# EAGLE board stereo_mix (EAGLE 9.6.2), part 1 of 2
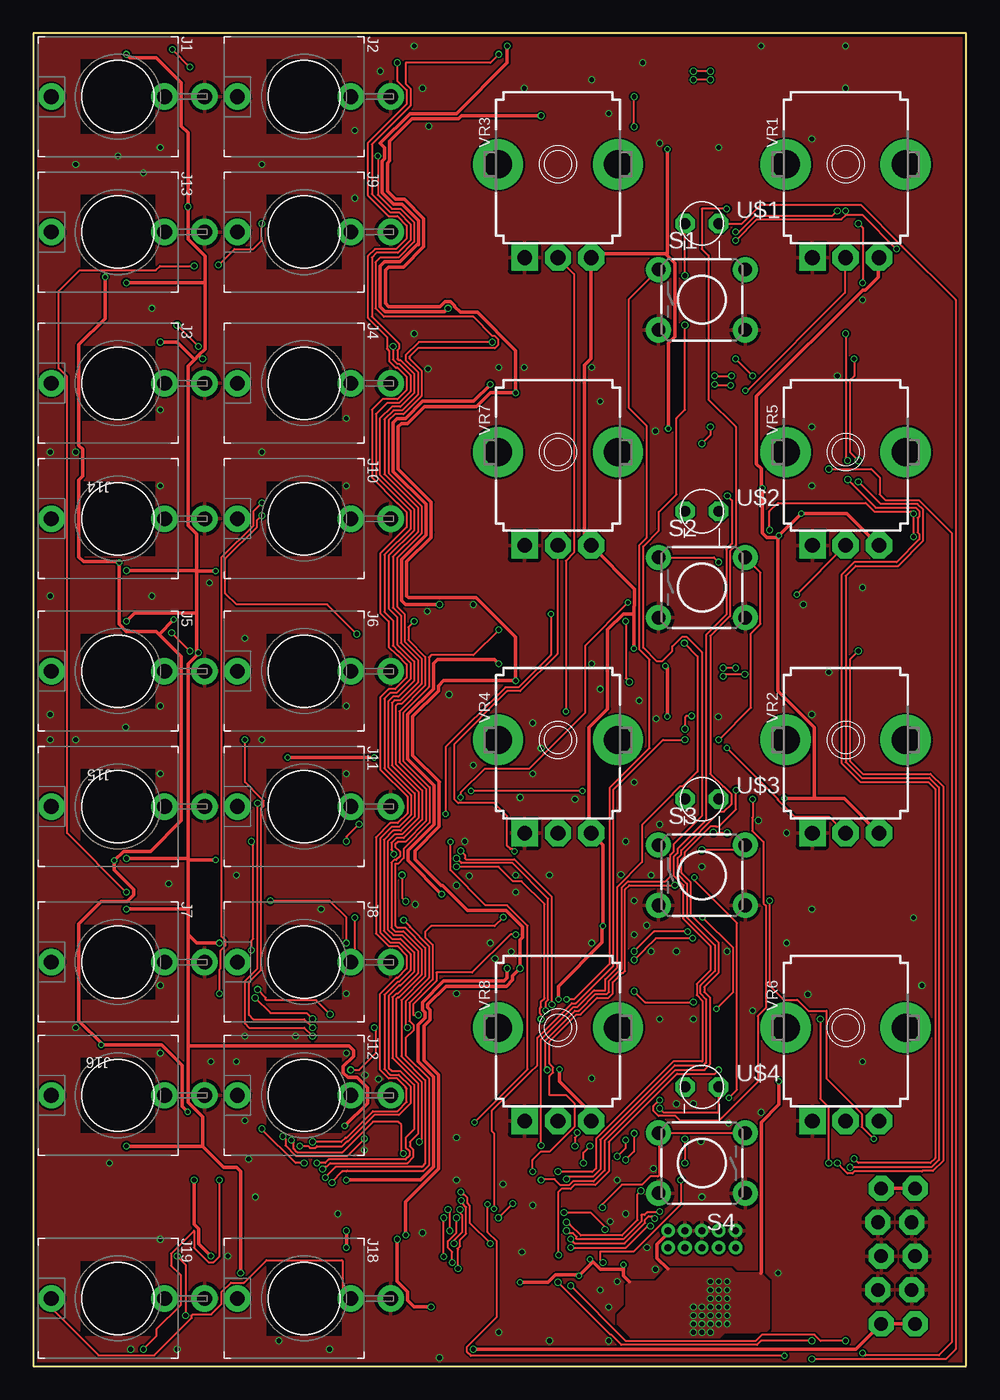
[diagram p0: board, top side]
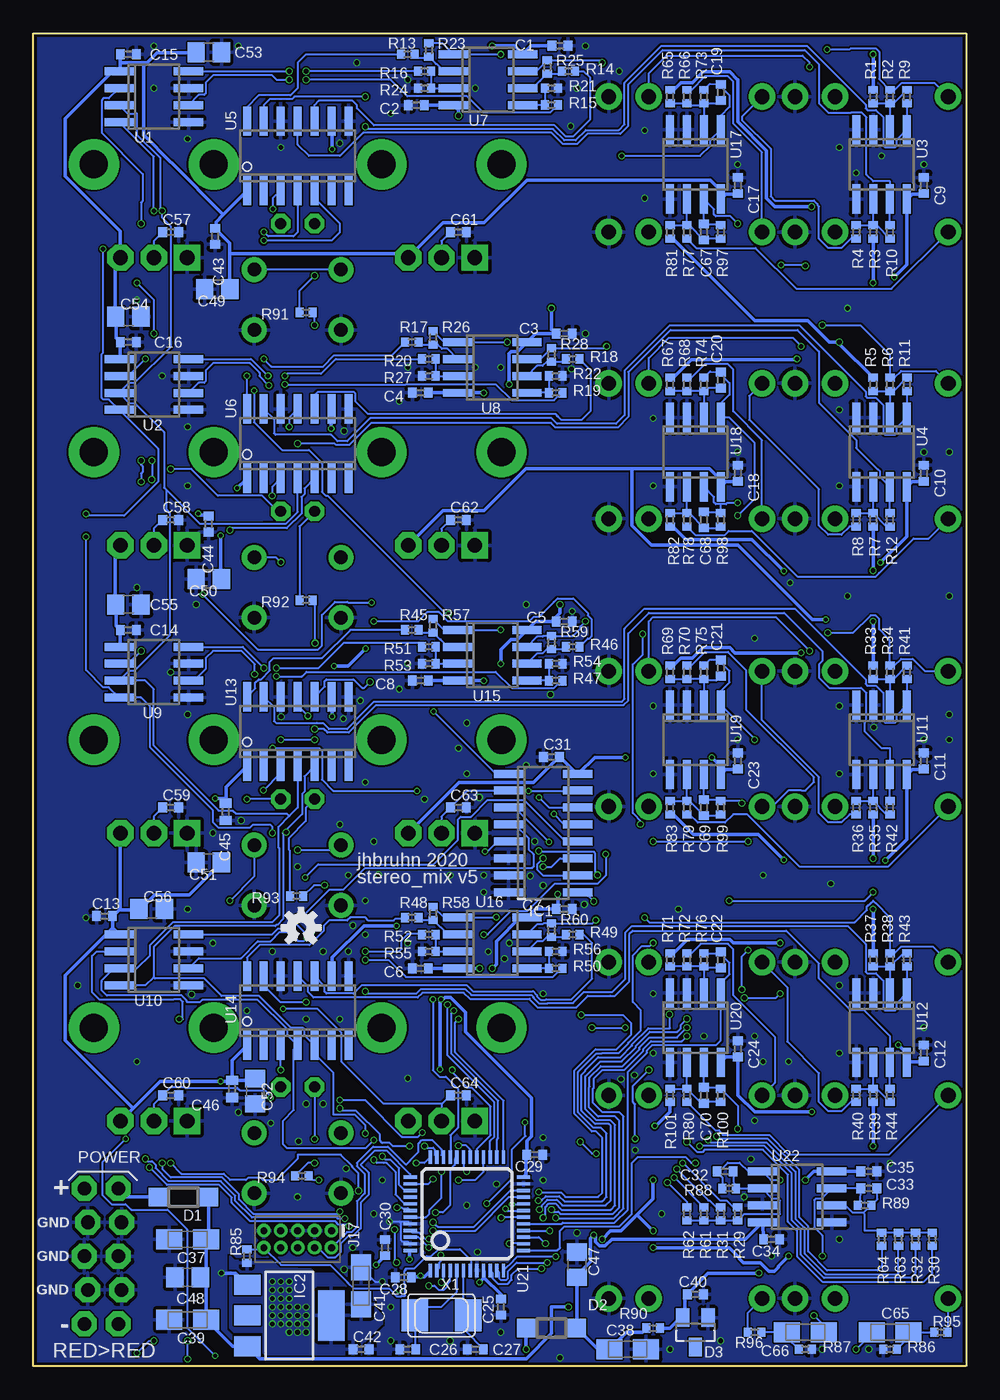
[diagram p1: board, bottom side, seen from below]

Size 70 x 100 mm. Coordinates in mm from the lower left corner, seen from the top.
Outline: 70,100 0,100 0,0 70,0 70,100
Copper layers (1*16): Top 0.035mm / dielectric 1.6mm / Bottom 0.035mm
Design rules "jlcpcb-2layers *": minimum track width 5mil, minimum drill 0.3mm, track to track 5mil, track to pad 5mil, pad to pad 5mil, via to via 5mil, smd to smd 5mil, copper to edge 0.2mm, drill to drill 6mil, minimum pad ring 10mil, minimum via ring 3mil, stop-mask expansion 4mil, vias tented up to drill 20mil, thermal gap 10mil
Net classes: 0 default: width 0.152 mm; 1 power: width 0.254 mm

## Footprints (pad centres in the part's own frame; a part is rotated, then mirrored left to right if it is on the bottom)
C0402 = smd 0.65 x 0.75: 1 -0.6,0; 2 0.6,0
EURO_PWR_HEADER_LOCK = drill 1.016 pad 1.88 octagon: GND1 -2.54,1.143; GND2 -2.54,-1.397; GND3 0,1.397; GND4 0,-1.143; GND5 2.54,1.143; GND6 2.54,-1.397; NEG1 -5.08,1.397; NEG2 -5.08,-1.143; POS1 5.08,1.397; POS2 5.08,-1.143
CASE-A_3216 = smd 1.95 x 1.5: + 1.375,0; - -1.375,0
C0402' = smd 0.7 x 0.9: 1 -0.65,0; 2 0.65,0
C0805 = smd 1.3 x 1.5: 1 -0.95,0; 2 0.95,0
SOD123 = smd 1.4 x 1.4: A 1.9,0; C -1.9,0
SOT23 = smd 1 x 1.4: 1 -0.95,-1.1; 2 0.95,-1.1; 3 0,1.1
SOIC16N = smd 0.6 x 2.2: 1 -4.445,-2.6; 2 -3.175,-2.6; 3 -1.905,-2.6; 4 -0.635,-2.6; 5 0.635,-2.6; 6 1.905,-2.6; 7 3.175,-2.6; 8 4.445,-2.6; 9 4.445,2.6; 10 3.175,2.6; 11 1.905,2.6; 12 0.635,2.6; 13 -0.635,2.6; 14 -1.905,2.6; 15 -3.175,2.6; 16 -4.445,2.6
SOT223 = smd 2 x 1.5: 1 3.15,-2.3; 2 3.15,0; 3 3.15,2.3 | smd 2 x 3.8: 4 -3.15,0
WQP-PJ301M-12_JACK = drill 1.1: P$1_TIP 0,5; P$2_SWITCH 0,-3.5; P$3_SLEEVE 0,-6.5
2X5-PTH-1.27MM = drill 0.508 pad 1: 1 -2.54,-0.635; 2 -2.54,0.635; 3 -1.27,-0.635; 4 -1.27,0.635; 5 0,-0.635; 6 0,0.635; 7 1.27,-0.635; 8 1.27,0.635; 9 2.54,-0.635; 10 2.54,0.635
R0402 = smd 0.6 x 0.7: 1 -0.5,0; 2 0.5,0
TACTILE-PTH = drill 1.016 pad 1.88: 1 -3.251,2.261; 2 3.251,2.261; 3 -3.251,-2.261; 4 3.251,-2.261
SOIC8 = smd 0.6 x 2.2: 1 -1.905,-2.6; 2 -0.635,-2.6; 3 0.635,-2.6; 4 1.905,-2.6; 5 1.905,2.6; 6 0.635,2.6; 7 -0.635,2.6; 8 -1.905,2.6
SO-14 = smd 0.6 x 2.2: 1 -3.81,-2.6; 2 -2.54,-2.6; 3 -1.27,-2.6; 4 0,-2.6; 5 1.27,-2.6; 6 2.54,-2.6; 7 3.81,-2.6; 8 3.81,2.6; 9 2.54,2.6; 10 1.27,2.6; 11 0,2.6; 12 -1.27,2.6; 13 -2.54,2.6; 14 -3.81,2.6
LQFP48 = smd 0.254 x 1: 1 -2.75,-4.25; 2 -2.25,-4.25; 3 -1.75,-4.25; 4 -1.25,-4.25; 5 -0.75,-4.25; 6 -0.25,-4.25; 7 0.25,-4.25; 8 0.75,-4.25; 9 1.25,-4.25; 10 1.75,-4.25; 11 2.25,-4.25; 12 2.75,-4.25; 25 2.75,4.25; 26 2.25,4.25; 27 1.75,4.25; 28 1.25,4.25; 29 0.75,4.25; 30 0.25,4.25; 31 -0.25,4.25; 32 -0.75,4.25; 33 -1.25,4.25; 34 -1.75,4.25; 35 -2.25,4.25; 36 -2.75,4.25 | smd 1 x 0.254: 13 4.25,-2.75; 14 4.25,-2.25; 15 4.25,-1.75; 16 4.25,-1.25; 17 4.25,-0.75; 18 4.25,-0.25; 19 4.25,0.25; 20 4.25,0.75; 21 4.25,1.25; 22 4.25,1.75; 23 4.25,2.25; 24 4.25,2.75; 37 -4.25,2.75; 38 -4.25,2.25; 39 -4.25,1.75; 40 -4.25,1.25; 41 -4.25,0.75; 42 -4.25,0.25; 43 -4.25,-0.25; 44 -4.25,-0.75; 45 -4.25,-1.25; 46 -4.25,-1.75; 47 -4.25,-2.25; 48 -4.25,-2.75
LED3MM = drill 0.813 octagon: 1 -1.27,0; 2 1.27,0
9MM_SNAP-IN_POT = drill 1.1 square: 1 -2.5,-7 | drill 1.1 octagon: 2 0,-7; 3 2.5,-7 | drill 2.1 pad 2.794: CHASSIS1 -4.5,0; CHASSIS2 4.5,0
NX5032 = smd 2 x 2.4: P$1 2,0; P$2 -2,0

## Placement (x,y rotation side)
C1  100nF  [C0402]  30.48,99.06 0 bottom
C2  100nF  [C0402]  41.27,94.61 0 bottom
C3  100nF  [C0402]  30.16,77.47 0 bottom
C4  100nF  [C0402]  40.96,73.03 0 bottom
C5  100nF  [C0402]  30.16,55.88 0 bottom
C6  100nF  [C0402]  40.96,29.84 0 bottom
C7  100nF  [C0402]  30.16,34.29 0 bottom
C8  100nF  [C0402]  40.96,51.44 0 bottom
C9  100nF  [C0402]  3.17,88.58 90 bottom
C10  100nF  [C0402]  3.17,66.99 90 bottom
C11  100nF  [C0402]  3.17,45.4 90 bottom
C12  100nF  [C0402]  3.17,23.5 90 bottom
C13  100nF  [C0402]  64.66,33.76 180 bottom
C14  100nF  [C0402]  62.87,55.24 0 bottom
C15  100nF  [C0402]  62.87,98.42 0 bottom
C16  100nF  [C0402]  62.87,76.83 0 bottom
C17  100nF  [C0402]  17.14,88.58 90 bottom
C18  100nF  [C0402]  17.14,66.99 90 bottom
C19  1.0nF  [C0402]  18.41,95.57 90 bottom
C20  1.0nF  [C0402]  18.41,73.98 90 bottom
C21  1.0nF  [C0402]  18.41,52.39 90 bottom
C22  1.0nF  [C0402]  18.41,30.48 90 bottom
C23  100nF  [C0402]  17.14,45.4 90 bottom
C24  100nF  [C0402]  17.14,23.81 90 bottom
C25  100nF  [C0402]  34.92,4.45 270 bottom
C26  22pF  [C0402]  41.91,1.27 0 bottom
C27  22pF  [C0402]  36.83,1.27 0 bottom
C28  100nF  [C0402]  42.23,6.67 180 bottom
C29  100nF  [C0402]  32.38,15.88 0 bottom
C30  100nF  [C0402]  43.6,8.89 90 bottom
C31  100nF  [C0402]  31.11,45.72 180 bottom
C32  220pF  [C0402]  18.1,14.61 180 bottom
C33  220pF  [C0402]  7.3,13.34 180 bottom
C34  100nF  [C0402]  14.61,9.53 180 bottom
C35  100nF  [C0402]  7.3,14.61 0 bottom
C36  EURO_POWER_LOCKFAT-LOCK  [EURO_PWR_HEADER_LOCK]  64.77,8.26 90 bottom
C37  10uF  [CASE-A_3216]  58.42,9.53 0 bottom
C38  10uF  [CASE-A_3216]  25.4,1.27 0 bottom
C39  10uF  [CASE-A_3216]  58.42,3.49 0 bottom
C40  100nF  [C0402]  20.32,5.4 0 bottom
C41  10uF  [CASE-A_3216]  45.4,6.03 270 bottom
C42  100nF  [C0402]  45.4,1.27 0 bottom
C43  100nF  [C0402]  56.36,84.77 270 bottom
C44  100nF  [C0402]  56.83,63.18 270 bottom
C45  100nF  [C0402']  55.56,41.59 270 bottom
C46  100nF  [C0402']  55.09,20.8 270 bottom
C47  22uF  [C0805]  29.21,7.62 270 bottom
C48  22uF  [C0805]  58.42,6.67 180 bottom
C49  10uF  [C0805]  56.2,80.8 180 bottom
C50  10uF  [C0805]  56.83,59.05 180 bottom
C51  10uF  [C0805]  56.83,37.78 180 bottom
C52  10uF  [C0805]  53.34,20.64 270 bottom
C53  10uF  [C0805]  56.83,98.58 0 bottom
C54  10uF  [C0805]  62.87,78.74 0 bottom
C55  10uF  [C0805]  62.87,57.15 0 bottom
C56  10uF  [C0805]  61.12,34.29 0 bottom
C57  100nF  [C0402]  59.69,85.09 0 bottom
C58  100nF  [C0402]  59.69,63.5 0 bottom
C59  100nF  [C0402]  59.69,41.91 0 bottom
C60  100nF  [C0402]  59.69,20.32 0 bottom
C61  100nF  [C0402]  38.1,85.09 0 bottom
C62  100nF  [C0402]  38.1,63.5 0 bottom
C63  100nF  [C0402]  38.1,41.91 0 bottom
C64  100nF  [C0402]  38.1,20.32 0 bottom
C65  10uF  [CASE-A_3216]  5.71,2.54 180 bottom
C66  10uF  [CASE-A_3216]  12.06,2.54 0 bottom
C67  1.0nF  [C0402]  19.68,85.09 90 bottom
C68  1.0nF  [C0402]  19.68,63.5 90 bottom
C69  1.0nF  [C0402]  19.68,41.91 90 bottom
C70  1.0nF  [C0402]  19.68,20.32 90 bottom
D1  B5819W  [SOD123]  58.74,12.7 180 bottom
D2  B5819W  [SOD123]  31.11,2.86 0 bottom
D3  LM4040AIM3-10.0  [SOT23]  20.32,2.54 180 bottom
IC1  4051CD4051  [SOIC16N]  31.75,40.01 270 bottom
IC2  AMS1117-3.3  [SOT223]  50.8,3.81 180 bottom
J1  WQP-PJ301M-12_JACK  [WQP-PJ301M-12_JACK]  6.35,95.25 90 top
J2  WQP-PJ301M-12_JACK  [WQP-PJ301M-12_JACK]  20.32,95.25 90 top
J3  WQP-PJ301M-12_JACK  [WQP-PJ301M-12_JACK]  6.35,73.74 90 top
J4  WQP-PJ301M-12_JACK  [WQP-PJ301M-12_JACK]  20.32,73.74 90 top
J5  WQP-PJ301M-12_JACK  [WQP-PJ301M-12_JACK]  6.35,52.15 90 top
J6  WQP-PJ301M-12_JACK  [WQP-PJ301M-12_JACK]  20.32,52.15 90 top
J7  WQP-PJ301M-12_JACK  [WQP-PJ301M-12_JACK]  6.35,30.32 90 top
J8  WQP-PJ301M-12_JACK  [WQP-PJ301M-12_JACK]  20.32,30.32 90 top
J9  WQP-PJ301M-12_JACK  [WQP-PJ301M-12_JACK]  20.32,85.09 90 top
J10  WQP-PJ301M-12_JACK  [WQP-PJ301M-12_JACK]  20.32,63.58 90 top
J11  WQP-PJ301M-12_JACK  [WQP-PJ301M-12_JACK]  20.32,41.99 90 top
J12  WQP-PJ301M-12_JACK  [WQP-PJ301M-12_JACK]  20.32,20.32 90 top
J13  WQP-PJ301M-12_JACK  [WQP-PJ301M-12_JACK]  6.35,85.09 90 top
J14  WQP-PJ301M-12_JACK  [WQP-PJ301M-12_JACK]  6.35,63.58 90 top
J15  WQP-PJ301M-12_JACK  [WQP-PJ301M-12_JACK]  6.35,41.99 90 top
J16  WQP-PJ301M-12_JACK  [WQP-PJ301M-12_JACK]  6.35,20.32 90 top
J17  CORTEX_DEBUG_PTH  [2X5-PTH-1.27MM]  50.16,9.53 180 bottom
J18  WQP-PJ301M-12_JACK  [WQP-PJ301M-12_JACK]  20.32,5.08 90 top
J19  WQP-PJ301M-12_JACK  [WQP-PJ301M-12_JACK]  6.35,5.08 90 top
LOGO1  OSHW-LOGOS  [OSHW-LOGO-S]  49.91,32.89 0 bottom
R1  91k  [R0402]  6.99,95.25 270 bottom
R2  100k  [R0402]  5.71,95.25 270 bottom
R3  91k  [R0402]  6.99,85.09 90 bottom
R4  100k  [R0402]  8.26,85.09 90 bottom
R5  91k  [R0402]  6.99,73.66 270 bottom
R6  100k  [R0402]  5.71,73.66 270 bottom
R7  91k  [R0402]  6.99,63.5 90 bottom
R8  100k  [R0402]  8.26,63.5 90 bottom
R9  15k  [R0402]  4.45,95.25 270 bottom
R10  15k  [R0402]  5.71,85.09 90 bottom
R11  15k  [R0402]  4.45,73.66 270 bottom
R12  15k  [R0402]  5.71,63.5 90 bottom
R13  47k  [R0402]  41.91,98.42 0 bottom
R14  47k  [R0402]  29.84,97.16 180 bottom
R15  47k  [R0402]  31.11,94.61 180 bottom
R16  47k  [R0402]  40.64,97.16 0 bottom
R17  47k  [R0402]  41.59,76.83 0 bottom
R18  47k  [R0402]  29.53,75.56 180 bottom
R19  47k  [R0402]  30.8,73.03 180 bottom
R20  47k  [R0402]  40.32,75.56 0 bottom
R21  100k  [R0402]  31.11,95.89 180 bottom
R22  100k  [R0402]  30.8,74.3 0 bottom
R23  300k  [R0402]  40.32,98.74 90 bottom
R24  100k  [R0402]  40.64,95.89 180 bottom
R25  300k  [R0402]  31.43,97.47 90 bottom
R26  300k  [R0402]  40.01,77.15 90 bottom
R27  100k  [R0402]  40.32,74.3 180 bottom
R28  300k  [R0402]  31.11,75.88 90 bottom
R29  100k  [R0402]  17.14,11.43 270 bottom
R30  100k  [R0402]  2.54,9.53 90 bottom
R31  100k  [R0402]  18.41,11.43 270 bottom
R32  100k  [R0402]  3.81,9.53 90 bottom
R33  91k  [R0402]  6.99,52.07 270 bottom
R34  100k  [R0402]  5.71,52.07 270 bottom
R35  91k  [R0402]  6.99,41.91 90 bottom
R36  100k  [R0402]  8.26,41.91 90 bottom
R37  91k  [R0402]  6.99,30.48 270 bottom
R38  100k  [R0402]  5.71,30.48 270 bottom
R39  91k  [R0402]  6.99,20.32 90 bottom
R40  100k  [R0402]  8.26,20.32 90 bottom
R41  15k  [R0402]  4.45,52.07 270 bottom
R42  15k  [R0402]  5.71,41.91 90 bottom
R43  15k  [R0402]  4.45,30.48 270 bottom
R44  15k  [R0402]  5.71,20.32 90 bottom
R45  47k  [R0402]  41.59,55.24 0 bottom
R46  47k  [R0402]  29.53,53.98 180 bottom
R47  47k  [R0402]  30.8,51.44 180 bottom
R48  47k  [R0402]  41.59,33.66 0 bottom
R49  47k  [R0402]  29.53,32.38 180 bottom
R50  47k  [R0402]  30.8,29.84 180 bottom
R51  47k  [R0402]  40.32,53.98 0 bottom
R52  47k  [R0402]  40.32,32.38 0 bottom
R53  100k  [R0402]  40.32,52.7 0 bottom
R54  100k  [R0402]  30.8,52.7 180 bottom
R55  100k  [R0402]  40.32,31.11 0 bottom
R56  100k  [R0402]  30.8,31.11 180 bottom
R57  300k  [R0402]  40.01,55.56 90 bottom
R58  300k  [R0402]  40.01,33.97 90 bottom
R59  300k  [R0402]  31.11,54.29 90 bottom
R60  300k  [R0402]  31.11,32.7 90 bottom
R61  100k  [R0402]  19.68,11.43 270 bottom
R62  100k  [R0402]  20.95,11.43 270 bottom
R63  100k  [R0402]  5.08,9.53 90 bottom
R64  100k  [R0402]  6.35,9.53 90 bottom
R65  120k  [R0402]  22.23,95.25 270 bottom
R66  100k  [R0402]  20.95,95.25 270 bottom
R67  120k  [R0402]  22.23,73.66 270 bottom
R68  100k  [R0402]  20.95,73.66 270 bottom
R69  120k  [R0402]  22.23,52.07 270 bottom
R70  100k  [R0402]  20.95,52.07 270 bottom
R71  120k  [R0402]  22.23,30.48 270 bottom
R72  100k  [R0402]  20.95,30.48 270 bottom
R73  20k  [R0402]  19.68,95.25 90 bottom
R74  20k  [R0402]  19.68,73.66 90 bottom
R75  20k  [R0402]  19.68,52.07 90 bottom
R76  20k  [R0402]  19.68,30.48 90 bottom
R77  200k  [R0402]  20.95,85.09 270 bottom
R78  200k  [R0402]  20.95,63.5 270 bottom
R79  200k  [R0402]  20.95,41.91 270 bottom
R80  200k  [R0402]  20.95,20.32 270 bottom
R81  120k  [R0402]  22.23,85.09 90 bottom
R82  120k  [R0402]  22.23,63.5 90 bottom
R83  120k  [R0402]  22.23,41.91 90 bottom
R85  10k  [R0402]  53.98,8.26 270 bottom
R86  47k  [R0402]  5.71,1.27 0 bottom
R87  47k  [R0402]  12.06,1.27 180 bottom
R88  100k  [R0402]  17.78,13.34 180 bottom
R89  100k  [R0402]  7.62,12.06 180 bottom
R90  470R  [R0402]  23.5,2.86 180 bottom
R91  100R  [R0402]  49.53,79.06 180 bottom
R92  100R  [R0402]  49.53,57.47 180 bottom
R93  100R  [R0402]  50.24,35.27 180 bottom
R94  100R  [R0402]  49.85,14.29 180 bottom
R95  1k  [R0402]  1.91,2.54 0 bottom
R96  1k  [R0402]  15.88,2.54 180 bottom
R97  20k  [R0402]  18.41,85.09 90 bottom
R98  20k  [R0402]  18.41,63.5 90 bottom
R99  20k  [R0402]  18.41,41.91 90 bottom
R100  20k  [R0402]  18.41,20.32 90 bottom
R101  120k  [R0402]  22.23,20.32 90 bottom
S1  [TACTILE-PTH]  50.16,80.01 0 top
S2  [TACTILE-PTH]  50.16,58.42 0 top
S3  [TACTILE-PTH]  50.16,36.83 0 top
S4  [TACTILE-PTH]  50.16,15.24 180 top
U1  MCP4822E-SN  [SOIC8]  60.96,95.25 270 bottom
U2  MCP4822E-SN  [SOIC8]  60.96,73.66 270 bottom
U3  MCP6002T-I/SN  [SOIC8]  6.35,90.17 180 bottom
U4  MCP6002T-I/SN  [SOIC8]  6.35,68.58 180 bottom
U5  MCP4922E/SL  [SO-14]  50.16,90.81 0 bottom
U6  MCP4922E/SL  [SO-14]  50.16,69.22 0 bottom
U7  TL072CD  [SOIC8]  35.88,96.52 270 bottom
U8  TL072CD  [SOIC8]  35.56,74.93 270 bottom
U9  MCP4822E-SN  [SOIC8]  60.96,52.07 270 bottom
U10  MCP4822E-SN  [SOIC8]  60.96,30.48 270 bottom
U11  MCP6002T-I/SN  [SOIC8]  6.35,46.99 180 bottom
U12  MCP6002T-I/SN  [SOIC8]  6.35,25.4 180 bottom
U13  MCP4922E/SL  [SO-14]  50.16,47.62 0 bottom
U14  MCP4922E/SL  [SO-14]  50.16,26.67 0 bottom
U15  TL072CD  [SOIC8]  35.56,53.34 270 bottom
U16  TL072CD  [SOIC8]  35.56,31.75 270 bottom
U17  MCP6002T-I/SN  [SOIC8]  20.32,90.17 180 bottom
U18  MCP6002T-I/SN  [SOIC8]  20.32,68.58 180 bottom
U19  MCP6002T-I/SN  [SOIC8]  20.32,46.99 180 bottom
U20  MCP6002T-I/SN  [SOIC8]  20.32,25.4 180 bottom
U21  STM32F030C8T6  [LQFP48]  37.47,11.43 0 bottom
U22  TL072CD  [SOIC8]  12.7,12.7 270 bottom
U$1  LED-BICOLOR-SHARED-THROUGHHOLE  [LED3MM]  50.16,85.72 0 top
U$2  LED-BICOLOR-SHARED-THROUGHHOLE  [LED3MM]  50.16,64.14 0 top
U$3  LED-BICOLOR-SHARED-THROUGHHOLE  [LED3MM]  50.16,42.55 0 top
U$4  LED-BICOLOR-SHARED-THROUGHHOLE  [LED3MM]  50.16,20.95 0 top
VR1  10k  [9MM_SNAP-IN_POT]  60.96,90.17 0 top
VR2  10k  [9MM_SNAP-IN_POT]  60.96,46.99 0 top
VR3  10k  [9MM_SNAP-IN_POT]  39.37,90.17 0 top
VR4  10k  [9MM_SNAP-IN_POT]  39.37,46.99 0 top
VR5  10k  [9MM_SNAP-IN_POT]  60.96,68.58 0 top
VR6  10k  [9MM_SNAP-IN_POT]  60.96,25.4 0 top
VR7  10k  [9MM_SNAP-IN_POT]  39.37,68.58 0 top
VR8  10k  [9MM_SNAP-IN_POT]  39.37,25.4 0 top
X1  8MHz  [NX5032]  39.37,3.81 0 bottom

## Library data of the parts
C1-C35 C37-C44 C47-C70 = jhbruhn-cdr; SPICEPREFIX: C
C36 = MusicThingModular
C45 C46 = jhbruhn-cr; SPICEPREFIX: C
D1 D2 X1 = jhbruhn-cdr
D3 = jhbruhn-ref
IC1 IC2 = jhbruhn-ic
J1-J19 S1-S4 U$1-U$4 VR1-VR8 = jhbruhn-physical
LOGO1 = SparkFun-Aesthetics
R1-R83 R85 R88-R90 R97-R101 = jhbruhn-cr; SPICEPREFIX: R
R86 R87 R91-R96 = jhbruhn-cdr; SPICEPREFIX: R
U1 U2 U5 U6 U9 U10 U13 U14 = jhbruhn-dac
U3 U4 U7 U8 U11 U12 U15-U20 U22 = jhbruhn-opamp
U21 = jhbruhn-mcu

## Nets
1_IN_L: J1.P$1_TIP J2.P$2_SWITCH R2.1
1_IN_R: J2.P$1_TIP R4.1
2_IN_L: J3.P$1_TIP J4.P$2_SWITCH R6.1
2_IN_R: J4.P$1_TIP R8.1
2_PAN_CV_IN: J10.P$1_TIP R68.1
2_VOLUME_CV: J14.P$1_TIP R78.2
3_IN_L: J5.P$1_TIP J6.P$2_SWITCH R34.1
3_IN_R: J6.P$1_TIP R36.1
3_PAN_CV_IN: J11.P$1_TIP R70.1
3_VOLUME_CV: J15.P$1_TIP R79.2
4_IN_L: J7.P$1_TIP J8.P$2_SWITCH R38.1
4_IN_R: J8.P$1_TIP R40.1
4_PAN_CV_IN: J12.P$1_TIP R72.1
4_VOLUME_CV: J16.P$1_TIP R80.2
+3V3 [power]: C9.1 C10.1 C11.1 C12.1 C13.1 C14.1 C15.1 C16.1 C17.1 C18.1 C23.1 C24.1 C25.1 C28.1 C29.1 C30.1 C31.1 C41.+ C42.1 C43.1 C44.1 C45.1 C46.1 C49.1 C50.1 C51.1 C52.1 C53.1 C54.1 C55.1 C56.1 IC1.16 IC2.4 J17.1 R85.2 U1.1 U2.1 U3.8 U4.8 U5.1 U5.9 U6.1 U6.9 U9.1 U10.1 U11.8 U12.8 U13.1 U13.9 U14.1 U14.9 U17.8 U18.8 U19.8 U20.8 U21.1 U21.9 U21.24 U21.48 VR1.3 VR2.3 VR3.3 VR4.3 VR5.3 VR6.3 VR7.3 VR8.3
+12V [power]: C1.1 C3.1 C5.1 C7.1 C35.1 C37.+ C39.+ C48.1 D1.C IC2.3 U7.8 U8.8 U15.8 U16.8 U22.8
-12V [power]: C2.2 C4.2 C6.2 C8.2 C34.2 C38.- C47.2 D2.A R90.2 U7.4 U8.4 U15.4 U16.4 U22.4
AREF_-10 [power]: C40.1 D3.2 R1.1 R3.1 R5.1 R7.1 R33.1 R35.1 R37.1 R39.1 R65.1 R67.1 R69.1 R71.1 R81.1 R82.1 R83.1 R90.1 R101.1
BIAS_DAC1_L: R16.1 U1.8
BIAS_DAC1_R: R15.1 U1.6
BIAS_DAC2_L: R20.1 U2.8
BIAS_DAC2_R: R19.1 U2.6
BIAS_DAC3_L: R51.1 U9.8
BIAS_DAC3_R: R47.1 U9.6
BIAS_DAC4_L: R52.1 U10.8
BIAS_DAC4_R: R50.1 U10.6
CS_BIAS_DAC_1: U1.2 U21.45
CS_BIAS_DAC_2: U2.2 U21.46
CS_BIAS_DAC_3: U9.2 U21.21
CS_BIAS_DAC_4: U10.2 U21.22
CS_DAC_1: U5.3 U21.38
CS_DAC_2: U6.3 U21.43
CS_DAC_3: U13.3 U21.28
CS_DAC_4: U14.3 U21.2
GND: C1.2 C2.1 C3.2 C4.1 C5.2 C6.1 C7.2 C8.1 C9.2 C10.2 C11.2 C12.2 C13.2 C14.2 C15.2 C16.2 C17.2 C18.2 C23.2 C24.2 C25.2 C26.1 C27.1 C28.2 C29.2 C30.2 C31.2 C34.1 C35.2 C36.GND1 C36.GND2 C36.GND3 C36.GND4 C36.GND5 C36.GND6 C37.- C38.+ C39.- C40.2 C41.- C42.2 C43.2 C44.2 C45.2 C46.2 C47.1 C48.2 C49.2 C50.2 C51.2 C52.2 C53.2 C54.2 C55.2 C56.2 C57.2 C58.2 C59.2 C60.2 C61.2 C62.2 C63.2 C64.2 D3.1 IC1.6 IC1.7 IC1.8 IC2.1 J1.P$3_SLEEVE J2.P$3_SLEEVE J3.P$3_SLEEVE J4.P$3_SLEEVE J5.P$3_SLEEVE J6.P$3_SLEEVE J7.P$3_SLEEVE J8.P$3_SLEEVE J9.P$3_SLEEVE J10.P$3_SLEEVE J11.P$3_SLEEVE J12.P$3_SLEEVE J13.P$3_SLEEVE J14.P$3_SLEEVE J15.P$3_SLEEVE J16.P$3_SLEEVE J17.3 J17.5 J17.9 J18.P$3_SLEEVE J19.P$3_SLEEVE R21.1 R22.2 R24.2 R27.2 R53.1 R54.1 R55.1 R56.1 R86.1 R87.1 S1.3 S1.4 S2.3 S2.4 S3.3 S3.4 S4.1 S4.2 U1.5 U1.7 U2.5 U2.7 U3.3 U3.4 U3.5 U4.3 U4.4 U4.5 U5.8 U5.12 U6.8 U6.12 U9.5 U9.7 U10.5 U10.7 U11.3 U11.4 U11.5 U12.3 U12.4 U12.5 U13.8 U13.12 U14.8 U14.12 U17.3 U17.4 U17.5 U18.3 U18.4 U18.5 U19.3 U19.4 U19.5 U20.3 U20.4 U20.5 U21.8 U21.23 U21.44 U21.47 U22.3 U22.5 VR1.1 VR2.1 VR3.1 VR4.1 VR5.1 VR6.1 VR7.1 VR8.1
LED_1: R91.1 U21.29
LED_1_N: U21.3 U$1.2
LED_2: R92.1 U21.30
LED_2_N: U21.4 U$2.2
LED_3: R93.1 U21.31
LED_3_N: U21.35 U$3.2
LED_4: R94.1 U21.32
LED_4_N: U21.36 U$4.2
MISO: U21.40
MOSI: U1.4 U2.4 U5.5 U6.5 U9.4 U10.4 U13.5 U14.5 U21.41
MUX_ADDR_0: IC1.11 U21.25
MUX_ADDR_1: IC1.10 U21.26
MUX_ADDR_2: IC1.9 U21.27
N$1: R13.1 U5.14
N$2: R3.2 R4.2 R10.1 U3.6
N$3: R13.2 R23.1 U7.2
N$4: R9.2 U3.1 U5.13
N$5: R10.2 U3.7 U5.11
N$6: R1.2 R2.2 R9.1 U3.2
N$7: R25.2 R30.1 U7.7
N$8: R23.2 R29.1 U7.1
N$9: R14.2 R25.1 U7.6
N$10: R14.1 U5.10
N$12: R91.2 U$1.1
N$13: R92.2 U$2.1
N$14: R16.2 R24.1 U7.3
N$15: C69.1 R79.1 R83.2 R99.1 U19.6
N$16: R15.2 R21.2 U7.5
N$17: C70.1 R80.1 R100.1 R101.2 U20.6
N$18: R93.2 U$3.1
N$19: R7.2 R8.2 R12.1 U4.6
N$20: R12.2 U4.7 U6.11
N$21: R11.2 U4.1 U6.13
N$22: R5.2 R6.2 R11.1 U4.2
N$23: R17.1 U6.14
N$24: R17.2 R26.1 U8.2
N$25: R26.2 R31.1 U8.1
N$26: R18.2 R28.1 U8.6
N$27: R18.1 U6.10
N$28: R28.2 R32.1 U8.7
N$29: R35.2 R36.2 R42.1 U11.6
N$30: R42.2 U11.7 U13.11
N$31: R41.2 U11.1 U13.13
N$32: C19.1 R65.2 R66.2 R73.1 U17.2
N$33: R33.2 R34.2 R41.1 U11.2
N$34: R45.1 U13.14
N$35: R45.2 R57.1 U15.2
N$36: R57.2 R61.1 U15.1
N$37: R46.2 R59.1 U15.6
N$38: R46.1 U13.10
N$39: R59.2 R63.1 U15.7
N$40: R39.2 R40.2 R44.1 U12.6
N$41: R44.2 U12.7 U14.11
N$42: R94.2 U$4.1
N$43: J18.P$2_SWITCH J19.P$1_TIP R95.2
N$44: R43.2 U12.1 U14.13
N$45: C65.- R86.2 R95.1
N$46: R37.2 R38.2 R43.1 U12.2
N$47 [power]: C36.POS1 C36.POS2 D1.A
N$48 [power]: C36.NEG1 C36.NEG2 D2.C
N$49: R48.1 U14.14
N$50: R48.2 R58.1 U16.2
N$51: R58.2 R62.1 U16.1
N$52: R49.2 R60.1 U16.6
N$53: R49.1 U14.10
N$54: R60.2 R64.1 U16.7
N$56: J18.P$1_TIP R96.2
N$57: C66.- R87.2 R96.1
N$62: C22.1 R71.2 R72.2 R76.1 U20.2
N$63: C21.1 R69.2 R70.2 R75.1 U19.2
N$64: C20.1 R67.2 R68.2 R74.1 U18.2
N$65: C67.1 R77.1 R81.2 R97.1 U17.6
N$67: R20.2 R27.1 U8.3
N$68: R19.2 R22.1 U8.5
N$70: R51.2 R53.2 U15.3
N$71: R47.2 R54.2 U15.5
N$72: R50.2 R56.2 U16.5
N$73: R52.2 R55.2 U16.3
N$74: C68.1 R78.1 R82.2 R98.1 U18.6
N$75: C27.2 U21.6 X1.P$1
N$76: C26.2 U21.5 X1.P$2
N$84: J9.P$1_TIP R66.1
N$89: J13.P$1_TIP R77.2
NRST: J17.10 R85.1 U21.7
OUT_L: C32.2 C65.+ R88.2 U22.1
OUT_R: C33.2 C66.+ R89.2 U22.7
PAN_1_POT: C61.1 IC1.1 VR3.2
PAN_2_POT: C62.1 IC1.5 VR7.2
PAN_3_POT: C63.1 IC1.2 VR4.2
PAN_4_POT: C64.1 IC1.4 VR8.2
PAN_CV_1: C19.2 R73.2 U17.1 U21.14
PAN_CV_2: C20.2 R74.2 U18.1 U21.15
PAN_CV_3: C21.2 R75.2 U19.1 U21.16
PAN_CV_4: C22.2 R76.2 U20.1 U21.17
POT_MUX: IC1.3 U21.18
SCK: U1.3 U2.3 U5.4 U6.4 U9.3 U10.3 U13.4 U14.4 U21.39
SUM_L: C32.1 R29.2 R31.2 R61.2 R62.2 R88.1 U22.2
SUM_R: C33.1 R30.2 R32.2 R63.2 R64.2 R89.1 U22.6
SWDCLK: J17.4 U21.37
SWDIO: J17.2 U21.34
SWITCH_1: S1.1 S1.2 U21.33
SWITCH_2: S2.1 S2.2 U21.19
SWITCH_3: S3.1 S3.2 U21.20
SWITCH_4: S4.3 S4.4 U21.42
VOL_1_POT: C57.1 IC1.13 VR1.2
VOL_2_POT: C58.1 IC1.14 VR5.2
VOL_3_POT: C59.1 IC1.15 VR2.2
VOL_4_POT: C60.1 IC1.12 VR6.2
VOL_CV_1: C67.2 R97.2 U17.7 U21.10
VOL_CV_2: C68.2 R98.2 U18.7 U21.11
VOL_CV_3: C69.2 R99.2 U19.7 U21.12
VOL_CV_4: C70.2 R100.2 U20.7 U21.13

## Tracks (layer width: path | path; a pad name or v marks a point on that pad's centre or on a via)
1_IN_L  (via drill 0.35)
  Top 0.152: v11.75,97.47 v10.43,98.79
  Bottom 0.152: J1.P$1_TIP 2.35,96.25 4.88,96.25 5.38,95.75 R2.1 6.53,96.57 6.53,98.61 6.8,98.88 8.67,98.88 8.76,98.79 v10.43,98.79 | J2.P$2_SWITCH 23.82,97 22.5,98.32 12.28,98.32 11.75,97.79 v11.75,97.47
1_IN_R
  Bottom 0.152: R4.1 8.66,84.59 9.36,83.9 10.34,83.9 11.04,84.6 11.04,87 11.15,87.1 11.15,87.18 11.42,87.45 14.34,87.45 14.66,87.77 14.66,91.34 16.82,93.5 16.82,93.75 J2.P$1_TIP
2_IN_L  (via drill 0.35)
  Top 0.152: v12.39,76.52 10.8,78.11 v10.79,78.11
  Bottom 0.152: J3.P$1_TIP 2.27,74.66 4.88,74.66 5.38,74.16 R6.1 5.71,75.88 7.94,78.11 v10.79,78.11 | J4.P$2_SWITCH 23.82,75.64 22.31,77.15 13.02,77.15 v12.39,76.52
2_IN_R
  Bottom 0.152: J4.P$1_TIP 16.27,72.79 16.27,71.02 11.04,65.79 11.04,63.09 10.34,62.39 9.36,62.39 8.74,63 R8.1
2_PAN_CV_IN
  Bottom 0.152: J10.P$1_TIP 15.32,69.48 17.48,71.64 17.48,74.78 17.88,75.18 19.6,75.18 20.62,74.16 R68.1
2_VOLUME_CV
  Bottom 0.152: J14.P$1_TIP 2.82,62.11 3.93,62.11 6.53,59.51 6.53,59.5 6.8,59.24 12.66,59.24 16.08,62.66 17.82,62.66 18.11,62.37 20.33,62.37 R78.2
3_IN_L  (via drill 0.35)
  Top 0.152: v11.75,53.66 v10.39,55.02
  Bottom 0.152: J5.P$1_TIP 3.09,52.15 4.01,53.07 4.88,53.07 5.38,52.57 R34.1 5.71,54.46 5.92,54.66 5.9,54.66 6.53,55.29 6.53,56.07 6.8,56.33 7.17,56.33 8.49,55.02 v10.39,55.02 | J6.P$2_SWITCH 23.82,55.87 23.5,56.2 14.29,56.2 v11.75,53.66
3_IN_R
  Bottom 0.152: J6.P$1_TIP 15.32,48.48 11.04,44.2 11.04,41.5 10.34,40.8 9.36,40.8 8.74,41.41 R36.1
3_PAN_CV_IN
  Bottom 0.152: R70.1 20.62,52.57 19.6,53.59 17.88,53.59 16.51,52.22 16.51,49.27 11.43,44.19 11.43,43.81 12.06,43.18 12.35,43.18 12.36,43.18 13.34,43.18 14.54,41.99 J11.P$1_TIP
3_VOLUME_CV
  Bottom 0.152: J15.P$1_TIP 5.88,37.47 12.48,37.47 16.43,41.41 17.48,41.41 18.11,40.78 20.14,40.78 20.77,41.41 R79.2
4_IN_L  (via drill 0.35)
  Top 0.152: J8.P$2_SWITCH 24.13,30.63 v24.13,33.66
  Bottom 0.152: J7.P$1_TIP 2.51,31.48 4.88,31.48 5.38,30.98 R38.1 5.71,33.66 6.8,34.74 6.99,34.92 7.17,34.74 7.44,34.48 7.44,34.23 8.37,33.3 23.77,33.3 v24.13,33.66
4_IN_R
  Bottom 0.152: R40.1 8.66,19.82 9.36,19.13 10.34,19.13 11.04,19.83 11.04,21.97 13.43,24.36 13.43,28.43 J8.P$1_TIP
4_PAN_CV_IN
  Bottom 0.152: J12.P$1_TIP 14.37,21.27 14.37,24.71 17.48,27.82 17.48,31.29 17.88,31.68 19.92,31.68 20.62,30.98 R72.1
4_VOLUME_CV
  Bottom 0.152: J16.P$1_TIP 5.79,15.88 13.3,15.88 14.78,17.35 18.28,17.35 18.28,17.44 18.54,17.7 18.84,17.7 R80.2
+3V3  (via drill 0.3, 0.35)
  Top 0.254: VR5.3 63.42,61.61 61.05,63.98 v57.63,63.98 v55.95,62.31 | v55.95,62.31 55.81,62.17 55.04,62.17 54.69,62.52 v54.69,65.87 54.62,65.94 54.62,67.33 54.27,67.69 54.27,72.78 62.24,80.75 62.45,80.75 63.42,81.72 63.42,83.12 VR1.3 | 58.6,42.61 60.84,42.61 63.42,40.02 VR2.3 | 58.6,42.61 v56.37,42.61 | 44.28,7.26 44.28,6.78 44.74,6.32 | 44.28,7.26 v44.28,7.61 | 41.98,7.82 42.54,7.26 44.28,7.26 | 41.98,7.82 v41.77,8.03 | 41.98,7.82 v40.93,6.78 40.86,6.84 39.19,6.84 38.63,6.29 v36.53,6.29 | 47.61,7.29 46.8,8.1 46.8,9.15 47.57,9.92 47.57,10.13 J17.1 | v55.95,21.37 55.95,19.63 54.62,18.3 54.62,7.05 54.61,6.99 | 58.6,42.61 58.6,47.92 55.88,50.64 55.88,62.1 v55.95,62.31 | v11.6,19.07 11.18,19.49 11.18,22.56 9.64,24.1 v5.1,24.1 5.17,24.17 3.42,25.91 3.42,33.18 5.1,34.85 7.05,34.85 7.54,35.34 7.54,35.76 6.08,37.23 v6.08,37.93 6.78,38.63 8.8,38.63 11.11,40.93 11.11,53.23 9.43,54.9 | 9.43,54.9 9.22,55.11 6.99,55.11 6.43,55.67 v6.43,60.28 6.36,60.35 3.77,60.35 3.42,60.7 3.42,66.5 3.7,66.78 3.7,68.8 3.42,69.08 3.42,76.62 5.38,78.58 v5.38,81.72 | v47.64,70.34 47.64,76.77 48.13,77.25 48.13,82.77 47.5,83.4 | 47.5,83.4 47.43,83.47 42.19,83.47 41.91,83.19 VR3.3 41.84,83.05 41.84,75.58 41.35,75.09 41.35,62.17 41.84,61.68 VR7.3 41.91,61.54 45.12,58.33 45.12,57.07 45.05,57 45.05,56.44 | v47.57,91.29 47.57,83.47 47.5,83.4 | v47.57,48.76 47.57,52.39 v47.43,52.53 | 45.05,56.44 v45.05,53.85 | v39.47,22.28 39.47,21.37 41.84,19 41.84,18.44 VR8.3 | v25.57,45.68 v19.07,45.68 | v39.4,27.52 39.4,28.5 42.68,31.78 42.68,32.97 v42.75,33.04 42.75,39.12 41.91,39.95 VR4.3 41.84,40.09 41.7,40.23 41.7,47.92 43.1,49.31 43.1,55.25 44.28,56.44 45.05,56.44
  Top 0.254: v10.55,56.02 9.43,54.9
  Bottom 0.254: C46.1 53.48,21.45 C52.1 | U14.1 55.09,22.96 C46.1 | U9.1 63.49,53.99 63.49,55.18 C14.1 63.56,55.32 63.77,55.53 63.77,57.14 C55.1 63.84,57.28 63.84,61.19 63.49,61.54 VR5.3 | v57.63,63.98 57.49,63.84 56.86,63.84 C44.1 | v55.95,62.31 55.95,59.09 C50.1 | v54.69,65.87 53.99,66.57 U6.1 | 55.53,42.61 55.53,43.45 53.99,44.98 U13.1 | 55.53,42.61 55.53,42.26 C45.1 | v56.37,42.61 55.53,42.61 | C25.1 34.92,5.38 36.18,6.64 | 36.18,6.64 36.18,7.12 U21.9 | 40.93,6.71 40.65,6.71 40.23,7.12 U21.1 | 40.93,6.71 41.56,6.71 C28.1 | v44.28,7.61 43.66,8.24 C30.1 | v41.77,8.03 41.77,8.66 U21.48 | v40.93,6.78 40.93,6.71 | v36.53,6.29 36.18,6.64 | 62.52,19.35 63.42,18.44 VR6.3 | 62.52,19.35 60.49,21.37 v55.95,21.37 55.18,21.37 C46.1 | 64.05,32.9 64.05,33.74 C13.1 63.98,33.81 63.56,34.23 63.49,34.23 | 64.05,32.9 63.56,32.41 U10.1 | 63.49,34.23 62.1,34.23 C56.1 61.96,34.3 60.91,35.34 58.33,35.34 55.95,37.72 C51.1 | 62.52,19.35 67.61,24.45 67.61,29.34 64.05,32.9 | 63.49,34.23 63.49,39.95 VR2.3 | C9.1 3.21,87.94 4.05,87.94 4.4,87.59 U3.8 4.47,87.45 4.47,82.63 v5.38,81.72 | C10.1 3.21,66.36 4.05,66.36 4.4,66.01 U4.8 4.47,65.87 4.47,62.24 v6.43,60.28 | C11.1 3.21,44.77 4.05,44.77 4.4,44.42 U11.8 4.47,44.28 4.47,39.53 v6.08,37.93 | C12.1 3.21,22.84 4.4,22.84 U12.8 4.47,22.91 4.47,23.47 v5.1,24.1 | U20.8 18.37,22.84 18.02,23.19 17.18,23.19 C24.1 17.11,23.12 17.11,20.33 15.86,19.07 v11.6,19.07 | U2.1 63.49,75.58 63.49,76.83 C16.1 63.56,76.91 63.77,77.11 63.77,78.72 C54.1 63.84,78.86 63.84,82.77 63.49,83.12 VR1.3 63.49,83.26 63.49,85.15 67.61,89.27 67.61,93.6 64.12,97.09 63.63,97.09 U1.1 63.49,97.16 63.49,97.79
  Bottom 0.254: 63.49,97.79 63.49,98.42 C15.1 | 61.47,97.79 60.7,98.56 57.84,98.56 C53.1 | 63.49,97.79 61.47,97.79 | 55.74,86.4 53.99,88.15 U5.1 | 55.74,86.4 56.3,85.85 56.3,85.43 C43.1 56.3,85.29 55.25,84.24 55.25,83.47 | 55.25,83.47 55.25,80.82 C49.1 | 55.74,86.4 59.6,90.26 59.72,90.39 61.64,92.3 61.66,92.3 61.72,92.36 61.72,97.54 61.47,97.79 | C17.1 17.18,87.94 18.02,87.94 18.37,87.59 U17.8 18.16,87.94 19.21,88.99 32.97,88.99 36.18,85.78 39.26,85.78 41.84,83.19 VR3.3 41.98,83.19 42.26,83.47 55.25,83.47 | v47.64,70.34 47.64,71.81 U6.9 | v47.57,91.29 47.57,93.39 U5.9 | C18.1 17.18,66.36 18.02,66.36 18.37,66.01 U18.8 18.23,66.29 19.28,67.33 25.08,67.33 | v47.57,48.76 47.57,50.22 U13.9 | v47.43,52.53 46.38,52.53 v45.05,53.85 | 25.08,67.33 33.04,67.33 36.18,64.19 39.26,64.19 41.84,61.61 VR7.3 | U21.24 33.18,14.25 33.04,14.39 33.04,15.86 C29.1 32.97,16 32.97,16.9 32.62,17.25 32.62,20.12 37.58,25.08 37.58,26.54 38.7,27.66 39.12,27.66 39.33,27.45 | 39.33,27.45 39.47,27.31 v39.47,22.28 | C23.1 17.18,44.77 18.02,44.77 18.37,44.42 U19.8 18.16,44.77 v19.07,45.68 | v25.57,45.68 27.87,45.68 29.06,44.49 IC1.16 29.2,44.42 30.45,45.68 C31.1 30.59,45.68 32.48,43.8 38.07,43.8 41.84,40.02 VR4.3 | v42.75,33.04 45.19,33.04 47.57,30.66 47.57,29.34 U14.9 | v39.4,27.52 39.33,27.45 | v10.55,56.02 11.53,56.02 17.11,61.61 23.61,61.61 25.08,63.08 25.08,67.33
  other vias: 50.8,6.35 51.44,6.35 52.07,6.35 52.07,5.71 51.44,5.71 50.8,5.71 50.8,5.08 51.44,5.08 52.07,5.08 52.07,4.45 51.44,4.45 50.8,4.45 50.16,4.45 49.53,4.45 49.53,3.81 50.16,3.81 50.8,3.81 51.44,3.81 52.07,3.81 52.07,3.17 51.44,3.17 50.8,3.17 50.16,3.17 49.53,3.17 49.53,2.54 50.16,2.54 50.8,2.54
  pour Bottom: 44.45,5.08 44.45,4.45 43.81,3.81 43.81,3.17 44.77,2.22 45.4,1.59 45.4,0.64 52.39,0.64 52.7,0.95 52.7,2.54 54.93,2.54 55.24,2.86 55.24,8.26 54.93,7.94 50.8,7.94 50.16,7.3 49.21,7.3 48.9,6.99 47.31,6.99 46.67,6.35 46.35,6.35 46.04,6.03 44.45,6.03
  pour Top: 43.81,3.81 43.81,3.17 44.83,2.16 51.51,2.16 51.89,2.54 54.93,2.54 55.24,2.86 55.24,6.35 54.61,6.99 52.7,6.99 52.39,7.3 47.62,7.3 46.67,6.35 44.77,6.35 44.45,6.03 44.45,4.45
+12V  (via drill 0.35)
  Top 0.254: v35.56,99.06 35.56,97.79 31.75,93.98 28.26,93.98 26.04,91.76 26.36,91.43 26.36,90.6 26.18,90.42 26.18,88.03 27.04,87.17 27.68,87.17 28.9,85.95 28.9,84.23 28.89,84.22 28.89,84.14 28.81,84.14 27.53,82.86 26.34,82.86 26.04,82.55 26.04,79.49 26.41,79.11 30.85,79.11 v31.11,79.38 | v35.56,29.84 35.56,29.12 35.33,28.89 30.8,28.89 29.21,27.3 29.21,26.75 29.4,26.56 29.4,26.14 28.86,25.61 28.86,22.87 30.02,21.71 30.02,14.95 29.04,13.97 v23.5,13.97 | v29.84,4.45 28.57,4.45 28.06,4.96 28.06,5.59 27.3,6.35 v27.3,9.53 | v23.5,10.16 v23.5,8.89 | v12.06,13.97 12.06,10.63 12.39,10.3 12.39,9.2 v13.34,8.26 | v30.64,35.4 28.11,37.93 28.11,38.69 30.07,40.64 30.07,43.57 28.08,45.56 28.08,48.88 30.02,50.83 30.02,52.7 30.32,53.01 34.62,53.01 v34.92,52.7 | v34.29,73.66 33.02,72.39 29.2,72.39 27.91,71.1 27.3,71.1 27,70.79 27,67.14 29.46,64.67 29.46,62.34 27.64,60.51 27.64,57.45 27.94,57.15 v30.48,57.15
  Bottom 0.254: D1.C 56.84,9.73 C37.+ 57.05,7.09 C48.1 57.05,6.24 C39.+ 55.06,1.51 IC2.3 53.01,0.57 33.01,0.57 31.11,2.46 31.11,4.45 v29.84,4.45 | C35.1 U22.8 11.43,14.61 v12.06,13.97 | C1.1 32.64,99.06 U7.8 33.91,99.06 v35.56,99.06 | C5.1 31.11,55.88 | 31.11,55.88 32.33,55.88 U15.8 33.68,54.53 34.16,54.53 34.92,53.77 v34.92,52.7 | v31.11,79.38 31.11,77.77 C3.1 32.33,77.47 U8.8 33.68,76.12 34.16,76.12 34.31,75.97 34.31,73.89 34.29,73.87 v34.29,73.66 | v30.48,57.15 30.48,56.52 31.11,55.88 | v30.64,35.4 30.64,34.44 C7.1 32.33,34.29 U16.8 33.47,33.66 35.25,31.88 35.25,30.16 v35.56,29.84 | v27.3,9.53 26.68,10.15 25.9,10.15 24.69,11.36 | 24.69,11.36 23.5,12.55 v23.5,13.97 | 24.69,11.36 v23.5,10.16 | v23.5,8.89 17.78,8.89 17.02,8.12 17.02,8.05 16.72,7.75 15.45,7.75 14.81,7.12 14.4,7.12 14.1,7.41 14.1,7.49 v13.34,8.26
-12V  (via drill 0.35)
  Top 0.254: v27.94,9.84 27.94,12.33 30.4,14.79 30.4,21.87 29.31,22.96 29.31,25.52 29.78,25.98 29.78,26.72 29.59,26.91 29.59,27.15 30.95,28.51 35.49,28.51 35.94,28.96 35.94,29.27 v36.51,29.84 36.51,31.99 36.7,32.18 36.7,32.96 35.48,34.18 32.57,34.18 30.69,36.06 30.61,36.06 28.64,38.04 28.64,38.67 30.45,40.49 30.45,43.79 30.48,43.81 28.46,45.83 28.46,48.73 30.4,50.67 30.4,51.04 30.8,51.44 v36.2,51.44 36.2,54.69 33.23,57.66 28.15,57.66 28.02,57.78 28.02,60.35 29.84,62.18 29.84,62.54 29.84,62.55 29.84,64.83 27.38,67.29 27.38,70.48 27.61,70.72 28.07,70.72 29.36,72.01 33.27,72.01 34.29,73.03 v36.2,73.03 36.2,76.19 33.31,79.07 32.05,79.07 31.62,79.5 31.62,79.58 31.32,79.88 30.91,79.88 30.52,79.49 26.67,79.49 26.42,79.75 26.42,82.23 26.66,82.47 27.77,82.47 29.28,83.99 29.28,86.11 27.84,87.55 27.2,87.55 26.58,88.17 26.58,90.27 26.74,90.44 26.74,91.92 28.41,93.6 31.91,93.6 32.13,93.82 v38.1,93.82
  Bottom 0.254: R90.2 24.31,2.54 25.5,2.54 C38.- 27.63,1.27 D2.A C47.2 29.21,6.81 28.21,7.82 28.21,9.58 v27.94,9.84 27.81,9.71 27.81,9.32 27.51,9.02 27.1,9.02 26.59,9.53 16.57,9.53 U22.4 15.26,10.75 C34.2 | C2.2 U7.4 38.1,94.24 v38.1,93.82 | C4.2 U8.4 v36.2,73.03 | C8.2 U15.4 v36.2,51.44 | C6.2 U16.4 v36.51,29.84
AREF_-10  (via drill 0.3, 0.35)
  Top 0.254: 12.7,16.51 12.7,18.71 11.61,19.8 11.61,24.03 | 12.25,53.31 11.61,52.66 11.61,38.1 | 12.25,53.31 12.25,56.52 | 12.25,56.52 12.25,59.65 | 12.25,59.65 12.25,59.69 | 12.25,59.69 12.25,62.42 11.61,63.06 11.61,75.03 12.11,75.53 | 11.61,24.03 11.61,32.38 | 11.61,32.38 11.61,34.29 | 11.61,34.29 11.61,38 | 11.61,38 11.61,38.1 | 12.11,75.53 12.42,75.84 | 12.42,75.84 12.89,76.31 12.89,81.28 | 12.89,81.28 12.89,83.29 11.61,84.58 v11.61,87 11.61,92.53 11.09,93.05 11.09,96.29 9.2,98.18 7.23,98.18 v6.99,98.42 | v6.99,81.28 12.89,81.28 | v9.53,76.83 10.79,76.83 12.11,75.53 | v6.99,59.69 12.25,59.69 | v6.99,55.88 7.62,56.52 12.25,56.52 | v6.99,38.1 11.61,38.1 | v6.99,34.29 11.61,34.29 | v6.99,16.51 12.7,16.51 | v12.7,75.56 12.42,75.84 | v12.38,53.52 12.38,53.44 12.25,53.31 | v13.97,31.75 12.24,31.75 11.61,32.38 | 12.7,16.51 14.29,14.92 15.24,14.92 15.56,14.61 v15.56,6.99 | v23.37,18.02 25.08,19.72 25.08,20.89 24.31,21.65 23.61,21.65 23.26,22 23.26,22.49 24.03,23.26 24.03,23.68 23.68,24.03 11.61,24.03 | 11.61,38 v13.69,38 | 12.25,59.65 v13.69,59.65
  Bottom 0.254: R90.1 22.23,2.86 21.27,3.81 D3.2 21.12,3.79 21.12,5.25 C40.1 19.38,6.99 v15.56,6.99 | v6.99,98.42 R1.1 | R3.1 v6.99,81.28 | R5.1 9.53,76.7 v9.53,76.83 10.27,76.83 11.87,78.44 15.86,78.44 22,84.59 22.21,84.59 R81.1 | R7.1 v6.99,59.69 | R33.1 v6.99,55.88 | R35.1 v6.99,38.1 | R37.1 v6.99,34.29 | R39.1 v6.99,16.51 | R65.1 21.96,95.75 21.41,96.3 20.54,96.3 19.74,97.1 17.74,97.1 17.16,96.52 17.14,96.52 17.14,93.36 14.99,91.2 14.99,87.63 14.36,87 v11.61,87 | R67.1 21.96,74.16 20.61,75.51 12.75,75.51 v12.7,75.56 | R69.1 21.96,52.57 21.41,53.12 20.54,53.12 19.74,53.92 17.74,53.92 17.34,53.52 v12.38,53.52 | R71.1 21.96,30.98 20.93,32.01 17.74,32.01 17.48,31.75 v13.97,31.75 | R101.1 22.23,19.09 23.3,18.02 v23.37,18.02 | v13.69,38 15.58,39.88 20.47,39.88 21.93,41.35 22.21,41.35 R83.1 | v13.69,59.65 16.07,62.03 21.02,62.03 21.93,62.94 22.21,62.94 R82.1
BIAS_DAC1_L  (via drill 0.35)
  Top 0.152: v50.8,97.16 v49.53,97.16
  Bottom 0.152: R16.1 v49.53,97.16 | U1.8 v50.8,97.16
BIAS_DAC1_R  (via drill 0.35)
  Top 0.152: v50.8,96.52 v49.53,96.52
  Bottom 0.152: R15.1 30.68,94.61 31.23,94.06 36.24,94.06 37.44,95.27 41.93,95.27 43.18,96.52 v49.53,96.52 | U1.6 57.59,95.38 57.18,95.38 57.06,95.5 57.06,96.3 56.52,96.84 52.07,96.84 51.75,96.52 v50.8,96.52
BIAS_DAC2_L  (via drill 0.35)
  Top 0.152: v51.12,74.3 v52.39,74.3
  Bottom 0.152: R20.1 47.31,75.56 48.42,74.45 50.96,74.45 v51.12,74.3 | v52.39,74.3 53.66,75.56 U2.8
BIAS_DAC2_R  (via drill 0.35)
  Top 0.152: v52.33,73.58 51.19,73.58 v51.12,73.66
  Bottom 0.152: v51.12,73.66 42.06,73.66 42.04,73.68 35.3,73.68 34.09,72.47 30.91,72.47 30.36,73.03 R19.1 | v52.33,73.58 53.02,74.28 53.02,74.53 53.73,75.25 56.52,75.25 57.06,74.71 57.06,73.91 57.18,73.79 57.59,73.79 U2.6
BIAS_DAC3_L  (via drill 0.35)
  Top 0.152: v52.7,52.39 v51.75,52.39
  Bottom 0.152: v51.75,52.39 48.58,52.39 46.67,54.29 41.14,54.29 R51.1 | U9.8 54.29,53.98 v52.7,52.39
BIAS_DAC3_R  (via drill 0.35)
  Top 0.152: v53.39,51.91 51.91,51.91 v51.75,51.75
  Bottom 0.152: R47.1 30.36,51.44 30.91,50.88 34.09,50.88 35.3,52.09 49.51,52.09 49.85,51.75 v51.75,51.75 | v53.39,51.91 53.39,52.68 54.37,53.66 56.52,53.66 57.06,53.12 57.06,52.32 57.78,51.59 57.78,51.44 U9.6
BIAS_DAC4_L  (via drill 0.35)
  Top 0.152: v49.09,32.61 46.58,32.61 v45.09,31.11
  Bottom 0.152: R52.1 40.9,32.47 41.91,32.47 41.91,32.39 42.36,31.94 42.36,31.3 42.55,31.11 v45.09,31.11 | U10.8 52.08,32.38 51.63,32.84 51.03,32.84 50.7,33.17 50.29,33.17 49.68,32.56 49.13,32.56 v49.09,32.61
BIAS_DAC4_R  (via drill 0.35)
  Top 0.152: v49.48,32.11 46.7,32.11 45.9,31.3 45.9,31.27 45.11,30.48 v45.09,30.48
  Bottom 0.152: R50.1 30.36,29.84 31.01,29.19 42.04,29.19 43.33,30.48 v45.09,30.48 | U10.6 57.59,30.61 54.42,30.61 53.15,31.88 52.2,31.88 51.51,32.56 50.8,32.56 50.14,31.9 49.68,31.9 v49.48,32.11
CS_BIAS_DAC_1  (via drill 0.35)
  Top 0.152: v61.91,85.72 62.23,85.41 v62.23,81.28 | v61.1,67.94 60.96,68.08 v60.96,77.47 | v61.12,66.52 61.46,66.19 61.46,66.17 63.22,64.41 66.23,64.41 66.49,64.14 66.49,63.77 66.36,63.63 66.36,62.55 66.49,62.42 66.49,62.04 64.78,60.33 61.59,60.33 60.64,59.37 60.64,45.25 62.08,43.81 67.16,43.81 67.67,43.3 67.67,15.6 67.31,15.24 61.91,15.24 v61.59,15.56 | v40.32,9.53 40.5,9.34 40.51,9.34 40.65,9.21 44.37,9.21 45.9,10.74 45.9,10.99 46.17,11.25 46.45,11.25 v46.63,11.07
  Bottom 0.152: U1.2 64.33,95.12 64.74,95.12 64.86,95 64.86,92.53 61.78,89.45 61.78,87.44 61.91,87.31 v61.91,85.72 | v62.23,81.28 60.96,80.01 v60.96,77.47 | v61.1,67.94 61.1,66.55 v61.12,66.52 | v61.59,15.56 61.41,15.38 61.09,15.38 60.82,15.11 60.82,14.86 59.84,13.88 55.94,13.88 54.84,12.78 54.84,12.39 53.6,11.15 47.22,11.15 47.14,11.07 v46.63,11.07 | v40.32,9.53 40.57,9.53 41.05,10.01 41.55,10.01 U21.45
CS_BIAS_DAC_2  (via drill 0.35)
  Top 0.152: v61.59,75.56 61.59,74.3 61.28,73.98 61.28,68.58 v61.91,67.94 | v61.91,66.36 63.58,64.69 66.34,64.69 66.77,64.26 66.77,61.93 64.89,60.05 61.71,60.05 60.96,59.3 60.96,45.33 62.15,44.13 67.23,44.13 67.94,43.42 67.94,15.48 67.39,14.92 v61.28,14.92 | v40.32,8.89 44.45,8.89 46.06,10.5 v46.31,10.5
  Bottom 0.152: U2.2 62.87,74.3 v61.59,75.56 | v61.91,67.94 61.91,67.64 61.78,67.5 61.78,67.12 61.91,66.98 v61.91,66.36 | v61.28,14.92 59.96,13.6 56.05,13.6 55.12,12.67 55.12,12.27 53.72,10.87 47.33,10.87 47.08,10.62 46.43,10.62 v46.31,10.5 | v40.32,8.89 41.11,9.68 U21.46
CS_BIAS_DAC_3  (via drill 0.35)
  Top 0.152: v61.91,53.66 61.28,53.02 61.28,45.4 62.23,44.45 67.31,44.45 68.26,43.5 68.26,15.4 67.5,14.64 66.71,14.64 66.67,14.61 61.6,14.61 61.47,14.47 61.09,14.47 60.82,14.73 60.82,14.74 v60.33,15.24 | v40.01,10.16 40.18,9.98 40.51,9.98 40.77,9.72 40.77,9.53 44.3,9.53 45.62,10.86 45.62,11.34 45.87,11.34 46.05,11.53 46.92,11.53 v46.99,11.61
  Bottom 0.152: U9.2 62.87,52.7 v61.91,53.66 | v60.33,15.24 60.33,14.8 59.69,14.16 55.82,14.16 54.56,12.9 54.56,12.51 53.49,11.44 46.99,11.44 v46.99,11.61 | v40.01,10.16 36.83,10.16 34.29,12.7 33.23,12.7 U21.21
CS_BIAS_DAC_4  (via drill 0.35)
  Top 0.152: v59.05,26.04 59.05,20.07 59.65,19.47 59.65,15.28 v59.69,15.24 | v40.01,10.79 40.19,10.61 40.27,10.61 41.08,9.8 44.18,9.8 45.35,10.97 45.35,12.9 v45.6,13.15
  Bottom 0.152: v59.05,26.04 58.78,26.04 58.78,27.34 58.98,27.53 59.45,27.53 59.5,27.49 59.88,27.49 59.89,27.49 65.02,27.49 65.58,28.05 65.58,30.79 65.25,31.11 U10.2 | v59.69,15.24 58.89,14.44 55.71,14.44 55.23,13.97 54.04,13.97 53.89,14.12 52.94,14.12 52.79,13.97 51.75,13.97 50.16,15.56 50.16,15.88 46.93,15.88 46.08,15.02 46.08,14.96 45.6,14.48 v45.6,13.15 | v40.01,10.79 39.82,10.61 39.64,10.44 36.95,10.44 34.2,13.18 U21.22
CS_DAC_1  (via drill 0.35)
  Top 0.152: v52.03,86.84 50.16,86.84 50.16,83.82 50.66,83.32 50.66,72.53 52.7,70.48 52.7,61.59 52.27,61.15 52.27,56.27 50.8,54.8 50.8,44.45 51.77,43.48 51.82,43.48 52.37,42.93 52.37,42.16 51.82,41.61 51.53,41.61 48.62,38.7 48.62,38.39 48.36,38.13 48.36,36.9 49.06,36.2 49.06,33.67 51.16,31.58 51.16,29.65 50.07,28.56 50.07,27.95 50.48,27.54 50.48,22.74 50.32,22.58 48.14,22.58 42.55,16.98 42.55,14.76 42,14.21 40.01,14.21 v40.01,14.04
  Bottom 0.152: U5.3 52.03,87.61 v52.03,86.84 | U21.38 40.36,13.68 v40.01,14.04
CS_DAC_2  (via drill 0.35)
  Top 0.152: v52.08,65.3 52.43,64.95 52.43,61.7 51.99,61.27 51.99,56.38 50.48,54.87 50.48,40.96 48.34,38.81 48.34,38.5 48.08,38.25 48.08,36.78 48.78,36.08 48.78,33.56 50.8,31.54 50.8,29.69 49.79,28.68 49.79,27.84 50.2,27.42 50.2,22.86 48.03,22.86 42.23,17.06 42.23,14.84 41.95,14.56 39.41,14.56 v39.37,14.61
  Bottom 0.152: U6.3 52.08,65.97 v52.08,65.3 | U21.43 40.54,11.18 40.28,11.44 40.28,11.72 39.37,12.63 v39.37,14.61
CS_DAC_3  (via drill 0.35)
  Top 0.152: v52.73,43.21 52.73,41.78 51.44,40.48 51.24,40.48 51.21,40.51 50.83,40.51 48.9,38.58 48.9,38.27 48.64,38.02 48.64,37.01 49.34,36.31 49.34,33.84 51.44,31.75 51.44,29.54 50.35,28.45 50.35,28.07 50.8,27.62 50.8,22.66 50.36,22.23 48.18,22.23 42.86,16.91 42.86,14.68 42.05,13.87 40.48,13.87 40.19,13.58 39.55,13.58 39.12,14.02 38.15,14.02 v38.1,13.97
  Bottom 0.152: v52.73,43.21 51.44,44.51 U13.3 | U21.28 36.22,14.59 36.83,13.97 v38.1,13.97
CS_DAC_4  (via drill 0.35)
  Top 0.152: v51.44,22.23 51.16,21.95 48.3,21.95 43.18,16.83 43.18,14.61 42.16,13.59 40.59,13.59 40.31,13.3 39.62,13.3 39.37,13.06 39.37,8.38 v39.42,8.33
  Bottom 0.152: v51.44,22.23 U14.3 | U21.2 39.55,7.35 39.55,7.76 39.42,7.89 v39.42,8.33
GND  (via drill 0.35)
  Bottom 0.152: U21.44 41.88,10.85 42.55,10.85 | 42.55,10.85 v43.28,10.85 | U21.47 41.88,9.35 42.3,9.35 42.42,9.47 42.42,9.89 | 42.42,9.89 | 42.42,9.89 42.42,9.97 | 42.42,9.97 | 42.55,10.85 42.42,10.72 42.42,9.97 | C41.- 44.34,6.35 v43.81,6.35
  Bottom 0.254: IC2.1 54.83,6.99 v55.88,6.99
  other vias: 9.53,91.44 6.35,90.81 24.13,92.71 24.13,87.63 8.26,89.53 9.53,71.75 23.5,71.12 23.5,66.04 9.53,66.04 9.53,49.53 23.5,49.53 9.53,44.45 23.5,44.45 9.53,28.57 23.5,27.94 23.5,23.5 9.53,23.5 3.17,25.4 15.88,24.77 3.17,46.99 17.14,46.99 3.17,68.58 17.14,68.58 3.17,90.17 17.14,90.17 9.53,9.53 16.67,12.7 14.61,8.26 5.71,15.24 7.3,1.27 10.79,1.27 22.23,1.27 18.41,1.91 29.21,10 34.92,2.54 38.73,1.91 43.18,1.91 46.04,8.89 42.55,5.71 36.67,8.57 35.24,13.65 31.75,13.97 31.75,17.14 54.61,99.06 60.96,99.06 58.42,92.08 60.96,95.89 51.44,91.44 46.99,91.76 29.21,95.89 28.57,99.06 26.04,97.16 29.69,93.03 41.91,96.52 43.18,93.98 28.57,77.47 29.62,74.83 34.92,74.93 36.83,74.93 41.91,74.93 42.55,72.39 46.69,70.15 58.42,70.48 60.33,74.3 62.23,80.01 57.78,57.15 62.23,58.42 59.69,52.07 58.42,48.9 46.74,48.56 42.55,50.8 45.47,49.94 41.91,52.7 31.19,50.39 29.57,56.64 33.02,57.15 36.2,36.83 28.65,34.65 41.91,31.75 46.35,31.11 52.07,31.11 58.12,27.89 58.42,34.29 66.04,33.66 56.52,40.01 54.41,40.94 54.61,19.05 6.93,47.93 51.41,48.72 56.52,31.75 43.81,13.97 30.48,0.64 22.86,11.43 41.91,21.59 15.88,54.61 58.42,66.04 45.72,97.79 36.83,95.89 45.09,43.81 46.99,40.64 1.27,57.78 1.27,68.58 1.27,46.99 15.24,36.83 21.59,34.29 34.65,30.58 35.86,31.09 34.29,31.75 46.35,36.83 50.16,12.7 46.69,7.26 44.45,11.43 46.53,14.83 43.18,4.45 46.02,33.07 48.26,31.11 31.75,27.94 36.53,42.67 19.68,24.77 13.34,22.86 15.24,22.86 45.09,34.92 44.45,39.37 45.09,32.38 36.2,35.56 32.72,36.78 31.75,36.07 32.38,39.37 38.73,36.83 1.27,48.9 13.21,58.78 33.02,45.09 37.47,44.45 40.64,42.55 37.47,48.26 38.1,46.35 44.09,36.88 24.84,16.21 15.88,18.41 50.16,37.47 24.89,21.84 25.91,21.54 16.15,15.54 62.23,22.86 8.89,79.38 46.99,26.04 66.67,28.57 53.98,26.67 49.53,26.04 48.26,19.68 49.53,19.68 52.17,18.24 50.09,16.87 8.89,57.78 10.16,36.2 37.47,12.06
  pour Bottom (rank 2): 0,100.33 0,0 70.48,0 70.48,100.33
  pour Top (rank 3): 0,100.33 0,0 70.48,0 70.48,100.33
LED_1  (via drill 0.35)
  Top 0.152: v48.9,78.11 48.9,71.75 48.26,71.12 48.26,65.41 46.94,64.08 46.94,62.68 45.77,61.51 45.77,53.91 46.8,52.88 47.17,52.88 47.95,53.66 47.95,53.99 48.69,54.73 49.02,54.73 50.16,53.58 50.16,41.27 48.06,39.17 48.06,38.62 47.8,38.36 47.8,36.73 47.45,36.37 44.63,36.37 44.13,35.88 44.13,29.77 44.06,29.77 43.2,28.92 43.2,28.08 43.04,27.91 42.19,27.91 40.94,26.67 40.64,26.67 38.42,24.45 38.42,22.23 v38.55,22.23
  Bottom 0.152: v48.9,78.11 48.9,78.92 R91.1 | U21.29 36.72,16.29 35.68,17.33 35.68,19.48 37.09,20.9 37.41,20.9 38.73,22.23 v38.55,22.23
LED_1_N  (via drill 0.35)
  Top 0.152: U$1.2 53.19,85.72 54.59,87.13 62.1,87.13 65.22,84.01 65.22,84 69.22,80.01 69.22,1.27 68.47,0.53 v58.42,0.53 | v58.42,1.91 54.61,1.91 54.3,1.6 44.13,1.6 43.37,2.36 43.31,2.36 v39.37,6.3
  Bottom 0.152: v58.42,0.53 v58.42,1.91 | v39.37,6.3 39.22,6.45 U21.3
LED_2  (via drill 0.35)
  Top 0.152: v38.1,16.56 38.1,24.52 40.52,26.95 40.83,26.95 42.07,28.19 42.93,28.19 42.93,29.03 43.81,29.92 43.81,35.95 45.68,37.82 45.68,40.6 47.96,42.88 47.96,42.93 48.51,43.48 48.72,43.48 49.85,44.6 49.85,53.26 v48.85,54.25
  Bottom 0.152: v48.85,54.25 48.85,57.29 R92.1 | U21.30 37.22,16.26 37.51,16.56 v38.1,16.56
LED_2_N  (via drill 0.35)
  Top 0.152: v59.69,67.31 62.87,67.31 63.5,66.67 63.5,65.41 63.94,64.97 66.46,64.97 68.94,62.49 68.94,1.8 67.94,0.81 62.41,0.81 v62.23,0.98 | v60.96,1.91 59.06,1.91 58.61,2.36 54.67,2.36 54.19,1.88 44.48,1.88 v40.33,6.03 v40.33,6.04
  Bottom 0.152: U$2.2 51.64,64.14 52.81,65.31 56.15,65.31 58.15,67.31 v59.69,67.31 | v62.23,0.98 61.31,1.91 v60.96,1.91 | v40.33,6.04 39.9,6.04 39.61,5.74 39.18,5.74 38.92,6.01 38.92,6.17 38.72,6.37 U21.4
LED_3  (via drill 0.35)
  Top 0.152: v37.47,14.61 37.47,15.47 38.1,16.1 38.76,16.1 40.64,17.98 40.64,19.68 40.01,20.32 38.73,20.32 38.73,21.76 39.01,22.04 39.01,22.41 38.73,22.69 38.73,24.37 40.76,26.39 41.06,26.39 42.3,27.64 43.16,27.64 43.48,27.96 43.48,28.8 44.17,29.49 44.25,29.49 44.41,29.65 44.41,35.76 44.73,36.08 v48.14,36.08
  Bottom 0.152: U21.31 37.72,14.86 v37.47,14.61 | v48.14,36.08 48.93,36.08 R93.1
LED_3_N  (via drill 0.35)
  Top 0.152: v53.98,42.55 53.98,41.16 53.95,41.13 53.95,40.17 54.79,39.33 54.79,34.74 54.97,34.56 54.97,26.87 54.37,26.27 54.37,21.35 51.44,18.41 48.54,18.41 48.19,18.77 46.91,18.77 46.54,19.15 46.54,19.53 46.8,19.79 46.81,19.79 v46.99,19.97 | v40.64,16.51 40.64,17.14 40.82,17.32 v40.82,17.52
  Bottom 0.152: U$3.2 v53.98,42.55 | v46.99,19.97 45.12,19.97 42.36,17.21 41.13,17.21 v40.82,17.52 | v40.64,16.51 40.51,16.38 40,16.38 39.88,16.26 39.88,15.85 U21.35
LED_4  (via drill 0.35)
  Top 0.152: v48.58,13.97 48.58,12.13 45.05,8.6 42.55,8.6 42.55,7.98 v42.75,7.78 | v39.82,11.53 41.81,11.53 42.9,10.44 v42.9,10.26
  Bottom 0.152: R94.1 49.03,13.97 v48.58,13.97 | U21.32 38.38,15.51 38.38,15.1 38.73,14.75 38.73,12.06 39.27,11.53 v39.82,11.53 | v42.75,7.78 42.9,7.92 v42.9,10.26
LED_4_N  (via drill 0.35)
  Top 0.152: v41.27,15.24 41.27,16.01 v41.77,16.51 | v46.99,19.34 47.28,19.05 51.44,19.05 U$4.2
  Bottom 0.152: U21.36 40.66,15.24 v41.27,15.24 | v41.77,16.51 43.02,16.51 43.27,16.75 43.81,16.75 44,16.93 44,17.38 45.78,19.16 46.81,19.16 v46.99,19.34
MOSI  (via drill 0.35)
  Top 0.152: v52.7,84.45 54.29,86.04 60.64,86.04 60.96,86.36 | 60.96,86.36 v60.96,86.68 | v64.77,83.82 62.23,86.36 60.96,86.36 | v66.04,62.23 v66.04,63.95 65.86,64.13 63.1,64.13 62.46,64.77 55.87,64.77 55.24,64.14 v55.24,62.73 | v45.09,17.46 45.09,16.12 v44.44,15.48 | v52.07,40.01 51.08,40.01 v51.02,40.06
  Bottom 0.152: v52.7,84.45 47.62,84.45 46.99,85.09 46.99,85.72 48.9,87.63 U5.5 | v64.77,83.82 64.77,76.04 64.86,75.95 64.86,72.64 64.74,72.52 64.33,72.52 U2.4 60.64,68.84 60.64,66.36 63.18,63.82 65.9,63.82 v66.04,63.95 | U6.5 49.66,65.85 49.66,65.43 49.89,65.21 49.89,63.97 50.99,62.87 55.24,62.87 v55.24,62.73 | v66.04,62.23 66.04,52.23 64.74,50.93 64.33,50.93 U9.4 61.91,50.16 61.24,49.49 61.24,46.44 56.52,41.71 56.52,40.81 56.1,40.39 53.76,40.39 53.51,40.64 52.23,40.64 52.07,40.48 v52.07,40.01 | U13.5 49.66,44.26 49.66,43.1 49.83,42.93 49.83,41.42 51.02,40.23 | U21.41 42.13,12.18 42.82,12.88 42.82,14.57 43.5,15.24 43.71,15.24 44.21,15.24 v44.44,15.48 | 51.02,40.23 51.27,39.99 51.27,33.54 51.69,33.12 51.74,33.12 51.84,33.02 59.41,33.02 60.96,31.47 60.96,29.21 60.98,29.18 | v45.09,17.46 45.09,18.07 45.9,18.88 47.49,18.88 47.49,22.03 48.9,23.43 U14.5 49.66,24.84 49.66,25.25 49.78,25.37 50.66,25.37 53.05,27.77 55.87,27.77 57.18,29.08 60.88,29.08 60.98,29.18 | v51.02,40.06 51.02,40.23 | 60.98,29.18 61.59,28.57 U10.4 | v60.96,86.68 60.96,90.75 U1.4
MUX_ADDR_0  (via drill 0.35)
  Top 0.152: v38.1,26.04 38.1,26.39 38,26.48 38,26.86 38.1,26.95 38.1,27.35 38.36,27.61 38.36,34.67 36.65,36.38 36.01,36.38 34.92,37.47 v31.75,37.47
  Bottom 0.152: U21.25 34.72,19.91 38.35,23.55 38.35,25.78 v38.1,26.04 | v31.75,37.47 31.11,37.47 30.48,38.1 IC1.11
MUX_ADDR_1  (via drill 0.35)
  Top 0.152: v38.46,26.67 38.46,27.32 38.64,27.49 38.64,35.07 35.97,37.74 32.11,37.74 31.94,37.92 31.93,37.92 v31.75,38.1
  Bottom 0.152: U21.26 35.22,17 35.12,17.09 35.12,19.92 38.63,23.43 38.63,26.5 v38.46,26.67 | v31.75,38.1 31.93,37.92 31.94,37.92 32.2,37.65 32.2,37.28 31.76,36.83 IC1.10
MUX_ADDR_2  (via drill 0.35)
  Top 0.152: v38.92,27.13 38.92,35.2 36.11,38.01 36.09,38.01 36.08,38.02 32.46,38.02 32.38,38.1 32.38,38.35 v32.08,38.66 | v27.67,36.85 27.67,35.14 v27.94,34.87
  Bottom 0.152: U21.27 35.72,16.89 35.4,17.21 35.4,19.8 38.91,23.32 v38.91,27.13 v38.92,27.13 | v27.67,36.85 27.85,37.02 27.85,38.48 27.97,38.6 32.03,38.6 v32.08,38.66 | v27.94,34.87 28.63,35.56 IC1.9
N$1
  Bottom 0.152: U5.14 53.98,94.46 53.09,95.34 50.71,95.34 50.16,95.89 50.16,97.79 49.53,98.42 R13.1
N$2
  Bottom 0.152: R4.2 R3.2 | R3.2 U3.6 | R10.1 6.71,85.59 R3.2
N$3
  Bottom 0.152: R23.1 40.26,98.17 | 40.26,98.17 39.79,97.71 39.76,97.71 39.2,97.16 U7.2 | R13.2 41.16,98.17 40.26,98.17
N$4  (via drill 0.35)
  Top 0.152: v45.09,93 v45.09,95.25
  Bottom 0.152: R9.2 U3.1 5.21,92 5.21,91.59 5.33,91.47 6.1,91.47 6.22,91.59 6.22,93.69 6.77,94.25 7.42,94.25 7.54,94.37 7.54,94.63 11.97,99.06 22.86,99.06 25.63,96.29 25.63,93.17 26.06,92.73 28.55,92.73 29.31,91.98 30.15,91.98 31,92.82 45.09,92.82 v45.09,93 | v45.09,95.25 50.41,95.25 50.59,95.06 52.26,95.06 52.7,94.61 U5.13
N$5
  Bottom 0.152: R10.2 U3.7 5.71,88.9 6.99,88.9 7.49,89.4 7.49,93.69 7.87,94.07 8.64,94.07 8.66,94.06 10.34,94.06 11.04,94.76 11.04,97.67 12.12,98.74 22.78,98.74 25.35,96.18 25.35,93.05 25.94,92.46 28.43,92.46 29.19,91.7 30.27,91.7 31.11,92.54 45.25,92.54 46.99,90.81 49.32,90.81 50.16,91.65 U5.11
N$6
  Bottom 0.152: R2.2 5.45,94.75 R9.1 | R1.2 R2.2 | R2.2 U3.2
N$7  (via drill 0.35)
  Top 0.152: v27.3,97.79 27.3,96.45 28.01,95.74 28.01,94.69 25.08,91.76 25.08,87.87 26.67,86.28 27.31,86.28 28.01,85.58 28.01,84.6 27.24,83.82 25.64,83.82 25.12,83.3 25.12,78.63 26.53,77.22 26.53,76.33 26.71,76.15 26.71,75.41 27.19,74.93 27.31,74.93 28.01,74.23 28.01,73.25 27.31,72.55 26.19,72.55 25.4,71.75 25.4,66.68 27.3,64.77 27.31,64.77 28.01,64.07 28.01,62.94 26.04,60.96 26.04,56.52 26.67,55.88 26.67,53.98 27.3,53.34 27.31,53.34 28.01,52.64 28.01,51.66 27.16,50.8 26.67,50.8 26.04,50.16 26.04,44.77 28.06,42.74 28.06,41.48 27.34,40.75 26.78,40.75 25.72,39.69 25.72,32.47 26.67,31.51 27.31,31.51 28.01,30.81 28.01,29.83 27.31,29.13 27.22,29.13 26.04,27.94 26.04,22.23 26.67,21.59 27.3,21.59 27.94,20.95 27.94,20.89 28.01,20.81 28.01,19.83 27.31,19.13 25.48,19.13 23.5,17.14 23.42,17.14 23.1,16.83 v20.95,16.83
  Bottom 0.152: U7.7 32.25,97.16 R25.2 27.49,97.97 v27.3,97.79 | R30.1 2.54,6.99 3.17,6.35 10.79,6.35 12.7,8.26 12.7,10.16 13.37,10.83 13.37,14.37 15.24,16.23 19.64,16.23 19.81,16.06 20.19,16.06 v20.95,16.83
N$8  (via drill 0.35)